# Altium PCB Line-tracker.PcbDoc
Units mil, origin at the board's own origin, x right, y up, seen from the top; angles counter-clockwise.
Board outline 1200 x 3000 mil, 2 copper layers (Top Layer, Bottom Layer); 13 components, 11 nets, 57 pads, 4 vias.
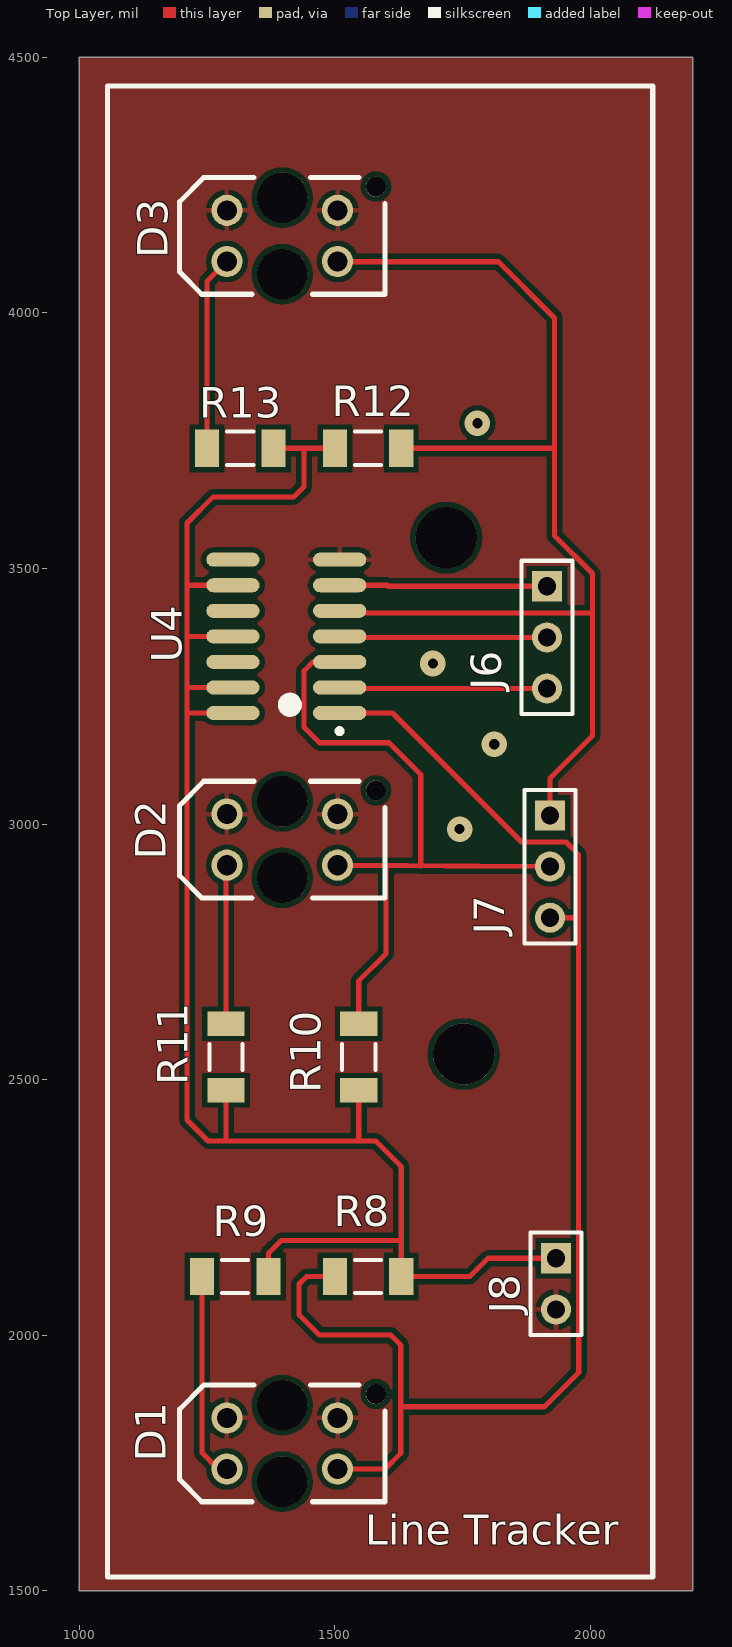
[diagram p0: Top Layer view]
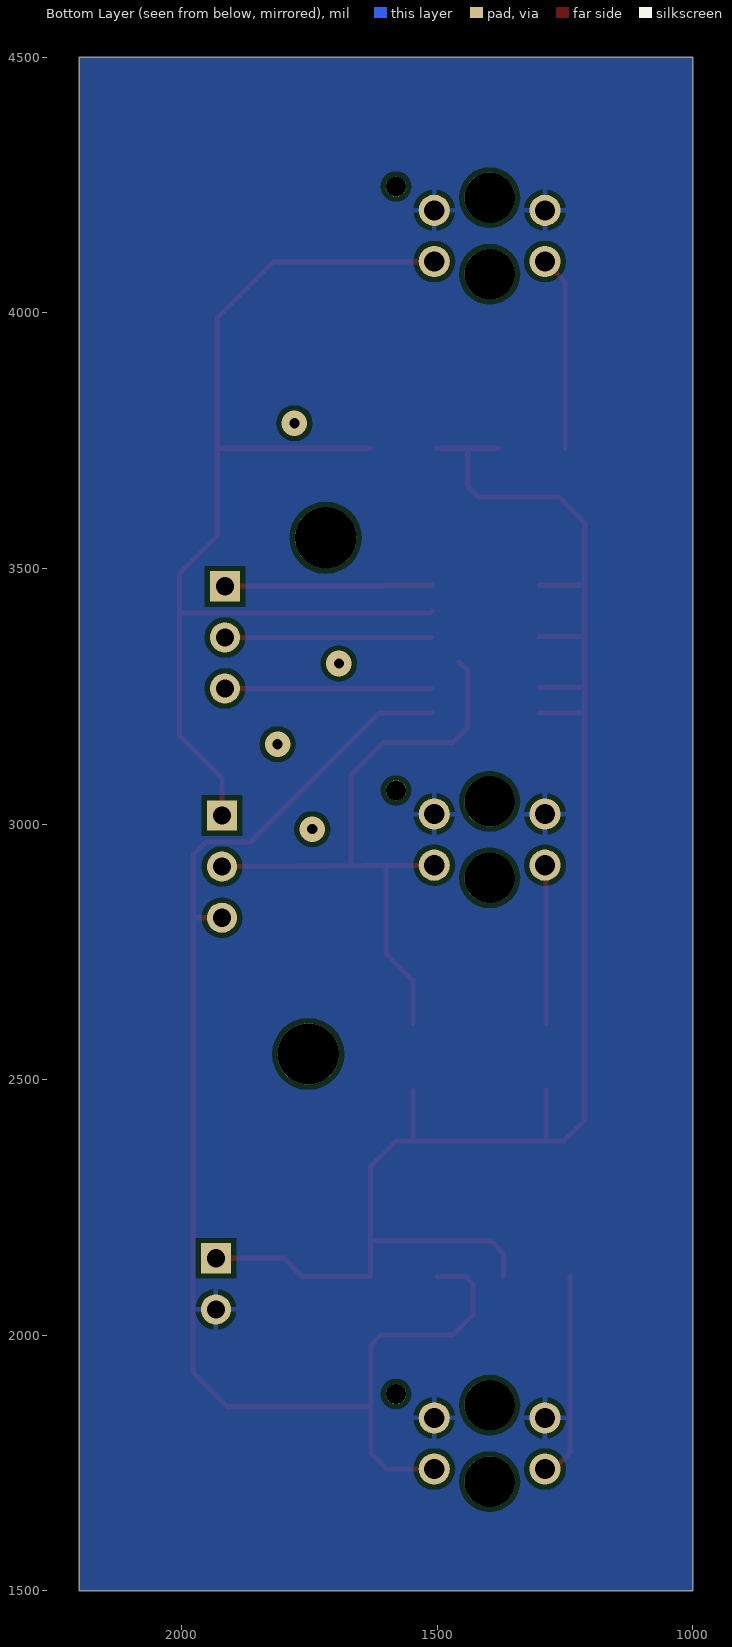
[diagram p1: Bottom Layer view, seen from below]

## Layer stack, top to bottom
Top Layer: signal copper 1.4
Dielectric: dielectric 12.6, FR-4, Dk 4.8
Bottom Layer: signal copper 1.4

## Board outline
1000,1500 2200,1500 2200,4500 1000,4500 1000,1500

## Design rules (kind name [scope] priority, off if disabled: settings)
Clearance [All] p1: gap=10
PolygonConnect [All] p1: connectstyle=Relief reliefconductorwidth=10 reliefentries=4 polygonreliefangle="90 Angle" airgapwidth=10
RoutingVias [All] p1: holewidth=28 width=50 viastyle="Through Hole" minholewidth=28 minwidth=50 maxholewidth=28 maxwidth=50
SolderMaskExpansion [All] p1: expansion=4
Width [All] p1: maxlimit=10 minlimit=10 preferedwidth=10
28 further rules are at their usual default settings.

## Components (designator, comment, footprint, x,y, rotation, side; value= is the part's Value field where it differs from the comment)
D1 "Optoisolator(custom)" FTPNT_OPTOISOLATOR 1397.2,1788.31 r180 top
D2 "Optoisolator(custom)" FTPNT_OPTOISOLATOR 1397.2,2969.41 r180 top
D3 "Optoisolator(custom)" FTPNT_OPTOISOLATOR 1397.2,4150.51 r180 top
J6 "Digital Output" HDR1X3 1915,3465 r270 top
J7 "Analog Output" HDR1X3 1920.83,3016.65 r270 top
J8 "Power" HDR1X2 1932.64,2150.51 r270 top
R8 "Res1" FTPNT_RESISTORS 1565,2115 r0 top
R9 "Res1" FTPNT_RESISTORS 1305,2115 r0 top
R10 "Res1" FTPNT_RESISTORS 1546.81,2544.21 r270 top
R11 "Res1" FTPNT_RESISTORS 1286.97,2544.21 r270 top
R12 "Res1" FTPNT_RESISTORS 1565,3735 r180 top
R13 "Res1" FTPNT_RESISTORS 1315,3735 r0 top
U4 "Hex Inverter" FTPNT_HEXINVERTER 1405.08,3367.05 r180 top

## Footprints (in the part's own frame and the unit in brackets; to place one, negate y for a bottom-side part, rotate by r counter-clockwise, add the part's x,y. Pads: shape width x height; smd on the part's side, far side on the other; paste and mask are expansions set on the pad)
FTPNT_HEXINVERTER [mm] "SOP, 14-Leads, Body 8.63x3.90mm, Pitch 1.27mm, IPC Low Density"
  oval 2.65x0.7 smd: 1(-2.65,3.81) 2(-2.65,2.54) 3(-2.65,1.27) 4(-2.65,0) 5(-2.65,-1.27) 6(-2.65,-2.54) 7(-2.65,-3.81) 8(2.65,-3.81) 9(2.65,-2.54) 10(2.65,-1.27) 11(2.65,0) 12(2.65,1.27) 13(2.65,2.54) 14(2.65,3.81)
  silkscreen extent -2.78,3.1 0.12,4.83, body extent -2,-4.4 2,4.4, height 1.75
FTPNT_OPTOISOLATOR [mm]
  round 1.55 hole 1: 1(2.75,1.27) 2(2.75,-1.27) 3(-2.75,-1.27) 4(-2.75,1.27)
  round 2.5 hole 2.5 unplated: 5(0,-1.9) 7(0,1.9)
  round 1 hole 1 unplated: 6(-4.65,-2.45)
  silkscreen extent -5.1,-2.9 5.1,2.9
FTPNT_RESISTORS [mm] "Chip Resistor, 2-Leads, Body 3.10x1.60mm, IPC Low Density"
  rect 1.2x1.85 smd: 1(-1.65,0) 2(1.65,0)
  silkscreen extent -0.65,-0.82 0.65,0.82, body extent -1.6,-0.85 1.6,0.85, height 0.7
HDR1X2 [mm] "Connector; Header; 2 Position"
  rect 1.5x1.5 hole 0.9: 1(0,0)
  round 1.5 hole 0.9: 2(2.54,0)
  silkscreen extent -1.27,-1.27 3.81,1.27
HDR1X3 [mm] "Connector; Header; 3 Position"
  rect 1.5x1.5 hole 0.9: 1(0,0)
  round 1.5 hole 0.9: 2(2.54,0) 3(5.08,0)
  silkscreen extent -1.27,-1.27 6.35,1.27

## Part data
D1 D2 D3: library part Optoisolator1, "SENSOR OPTO TRANS 15MM REFL PCB"
J6 J7: library part "Header 3", "CONN HEADER VERT 3POS .100 TIN"
J8: library part "Header 2", "CONN HEADER VERT 2POS .100 TIN"
R8 R9 R10 R11 R12 R13: "RES 300 OHM 1/4W 1% 1206 SMD"
U4: library part "Header 7X2A", "IC TRIGGER HEX INVERT 14-SOIC"

## Free pads (board coordinates)
  round 120 hole 120 unplated: 1(1718,3560) 1(1752,2550)

## Via types
v1: diameter 50, hole 20, Top Layer to Bottom Layer, 4 vias

## Nets (pads, with @x,y where several pads share a name; then routed paths per layer and width w, separated by ;. In a path a pad name is that pad's centre, name@x,y a point inside that pad or via, vN(x,y) a via of type N, cw(c..) or ccw(c..) an arc to the next point about the centre after c; other vN are vias at no path point)
"5V LT": J8.1 R8.2 R9.2 R10.2 R11.2 R12.2 R13.2 U4.9 U4.11 U4.13 U4.14 | length 3460.3
  Top Layer w10: 1211.05,3217.05 U4.14 ; 1211.95,3267.05 U4.13 ; 1213.95,3367.05 U4.11 ; 1213.95,3467.05 U4.9 ; 1286.97,2383.03 R11.2 ; R9.2 1369.96,2159.96 1395,2185 1624.96,2185 ; R13.2 R12.2 ; 1440,3730 1440,3660 1420,3640 1262,3640 1211,3589 1211,2421 1252,2380 1580,2380 1629.96,2330.04 R8.2 1763.98,2115 1799.49,2150.51 J8.1 ; 1546.81,2383.19 R10.2
GND: D1.2 D1.3 D2.2 D2.3 D3.2 D3.3 J8.2 U4.7
NetD1_1: D1.1 R9.1 | length 407
  Top Layer w10: R9.1 1240.04,1769.96 1271.69,1738.31 D1.1
NetD1_4: D1.4 J7.3 R8.1 U4.1 | length 2735.3
  Top Layer w10: R8.1 1445,2115 1430,2100 1430,2040 1470,2000 1610,2000 1629,1981 1629,1860 ; D1.4 1598.31,1738.31 1629,1769 1629,1860 ; U4.1 1612.95,3217.05 1865,2965 1952,2965 1977,2940 1977,2816.65 ; J7.3 1977,2816.65 ; 1629,1860 1910,1860 1977.17,1927.17 1977.17,2189.83 1977,2190 1977,2816.65
NetD2_1: D2.1 R11.1 | length 311.1
  Top Layer w10: R11.1 1286.97,2917.44 D2.1
NetD2_4: D2.4 J7.2 R10.1 U4.3 | length 1353.3
  Top Layer w10: 1457.05,3317.05 1440,3300 1440,3189 1470,3159 1606,3159 1668,3097 1668,2917.65 ; D2.4@1529.41,2919.41 D2.4 J7.2 ; R10.1 1546.81,2693.19 1600,2746.38 1600,2916.65 1597.24,2919.41
NetD3_1: D3.1 R13.1 | length 381.6
  Top Layer w10: R13.1 1250.04,4061.61 D3.1
NetD3_4: D3.4 J7.1 R12.1 U4.5 | length 2300.1
  Top Layer w10: D3.4 1505.98,4100 1820,4100 1930,3990 1930,3564 2004,3490 2004,3413 ; U4.5 1513.46,3413 2004,3413 ; R12.1 1925,3735 ; J7.1 1920.83,3089.49 2004,3172.66 2004,3413
NetJ6_1: J6.1 U4.6 | length 406.4
  Top Layer w10: U4.6 1602.95,3467.05 1605,3465 J6.1
NetJ6_2: J6.2 U4.4 | length 403.5
  Top Layer w10: U4.4@1511.46,3365 J6.2
NetJ6_3: J6.3 U4.2 | length 403.5
  Top Layer w10: U4.2@1511.46,3265 J6.3
pads on no net: D1.5 D1.6 D1.7 D2.5 D2.6 D2.7 D3.5 D3.6 D3.7 U4.8 U4.10 U4.12
copper on no net:
  other v1: 1744,2990 1812,3156 1692,3314 1779,3784

## Polygon pours and split planes (outlines as drawn)
GND on Top Layer "GND" (solid, remove dead copper, pour order 12): 1050,1500 2200,1500 2200,4500 1000,4500 1000,1500
GND on Bottom Layer "GND" (solid, remove dead copper, pour order 14): 1000,1500 2200,1500 2200,4500 1000,4500 1000,1500

## Silkscreen, mask and mechanical layers (free items; w line width, h text height)
Top Overlay:
  lines w10: 1055,1527 1055,4444 2122,4444 2122,1831.23 2122,1527 1055,1527
  text "Line Tracker" at 1560,1570 h100
BOARD OUTLINE:
  lines w1: 1000,1500 2200,1500 2200,4465 1000,4465 1000,1500